# Altium PCB Analog RPM PCB.PcbDoc
Units mm, origin at the board's own origin, x right, y up, seen from the top; angles counter-clockwise.
Board outline 36 x 29 mm, 4 copper layers (Top Layer, Mid Layer 1, Mid Layer 2, Bottom Layer), stack 1.57 mm thick; 35 components, 20 nets, 108 pads, 22 vias.
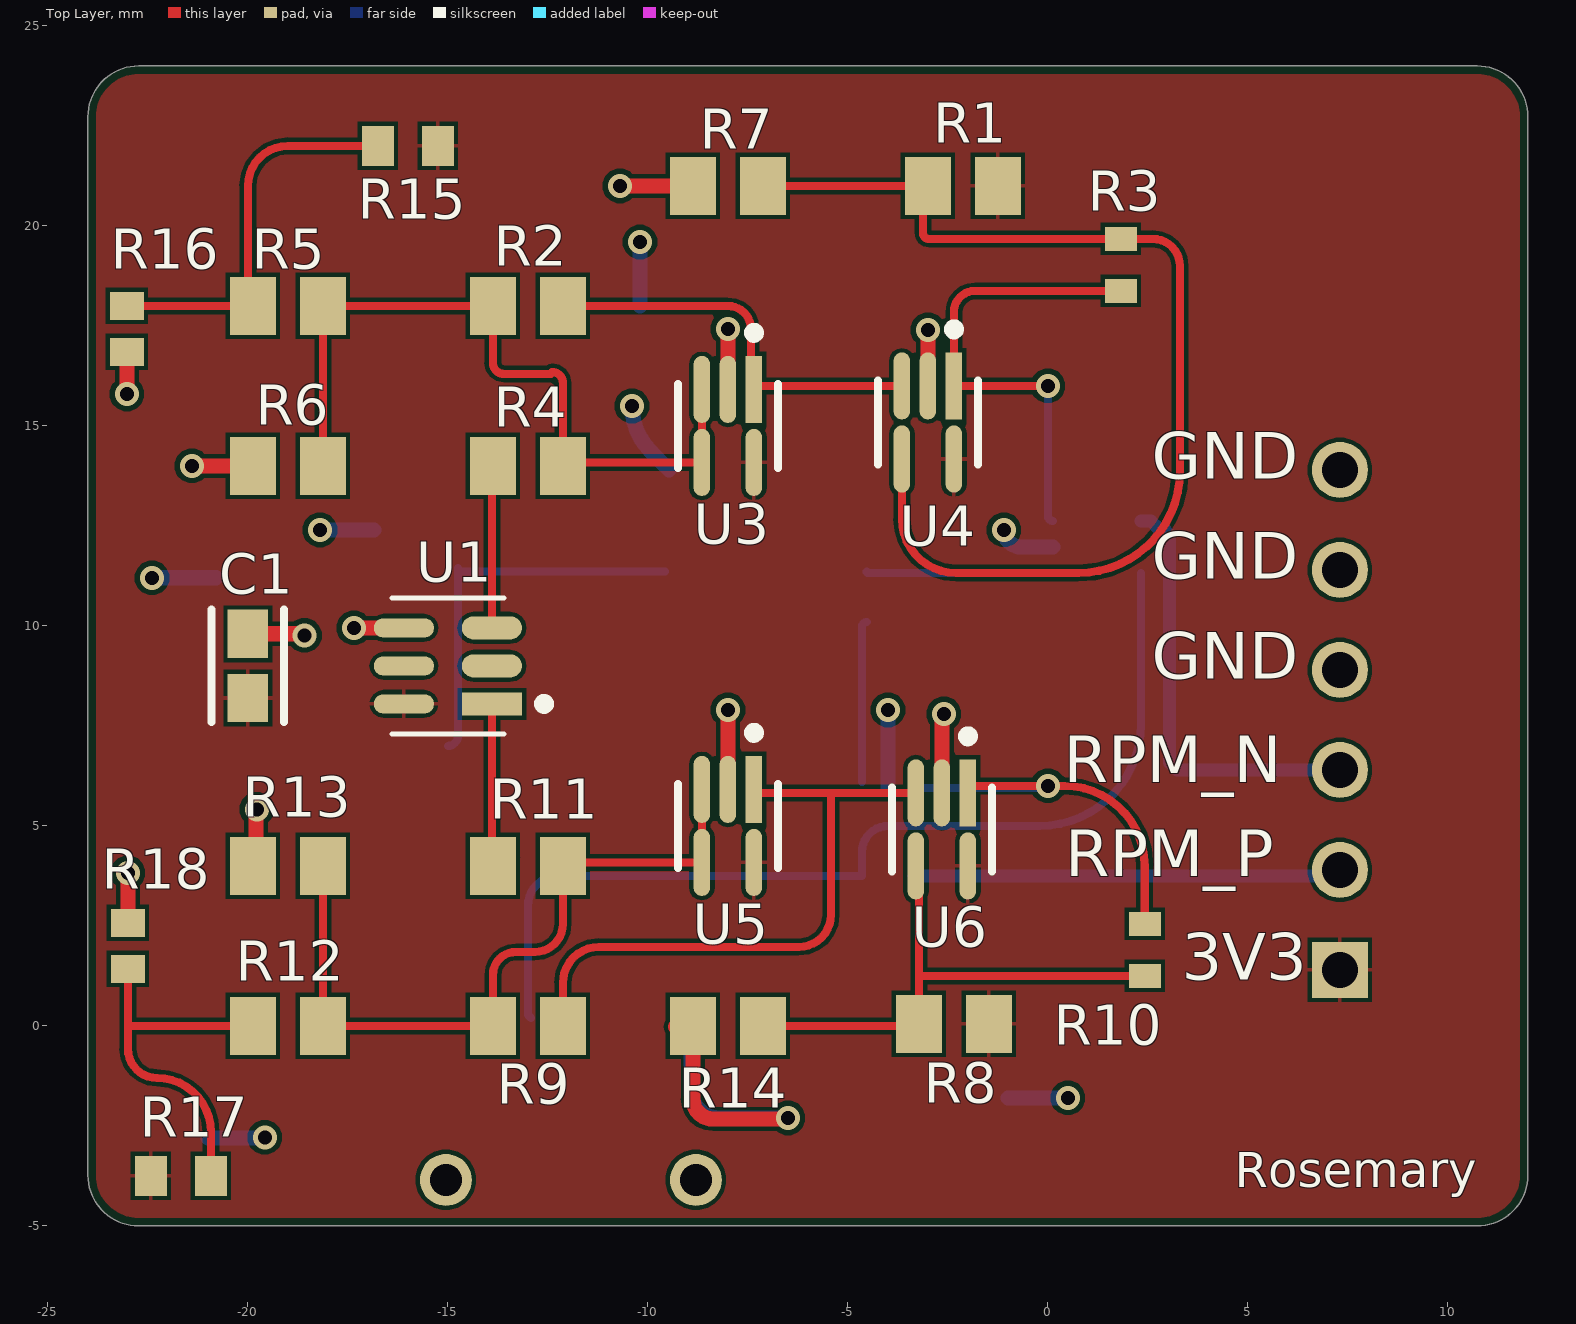
[diagram p0: Top Layer view]
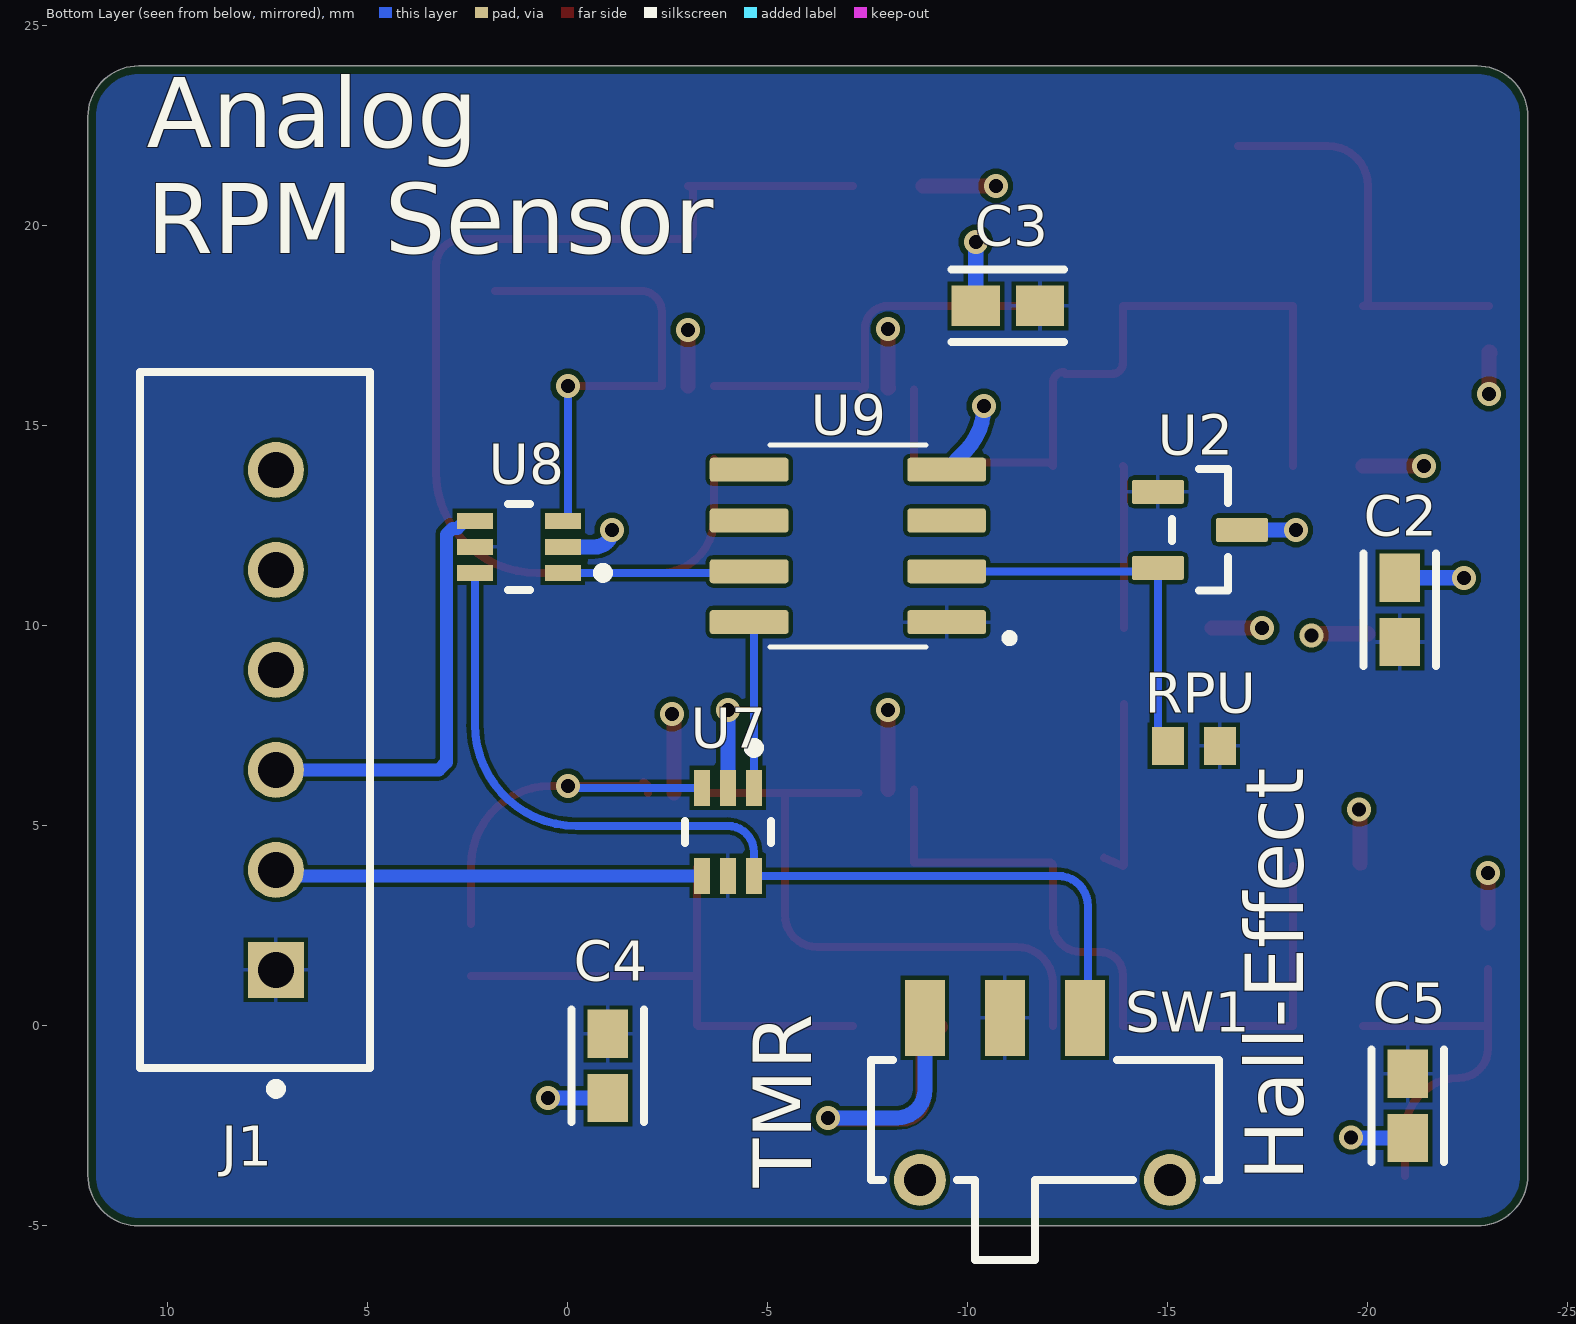
[diagram p1: Bottom Layer view, seen from below]
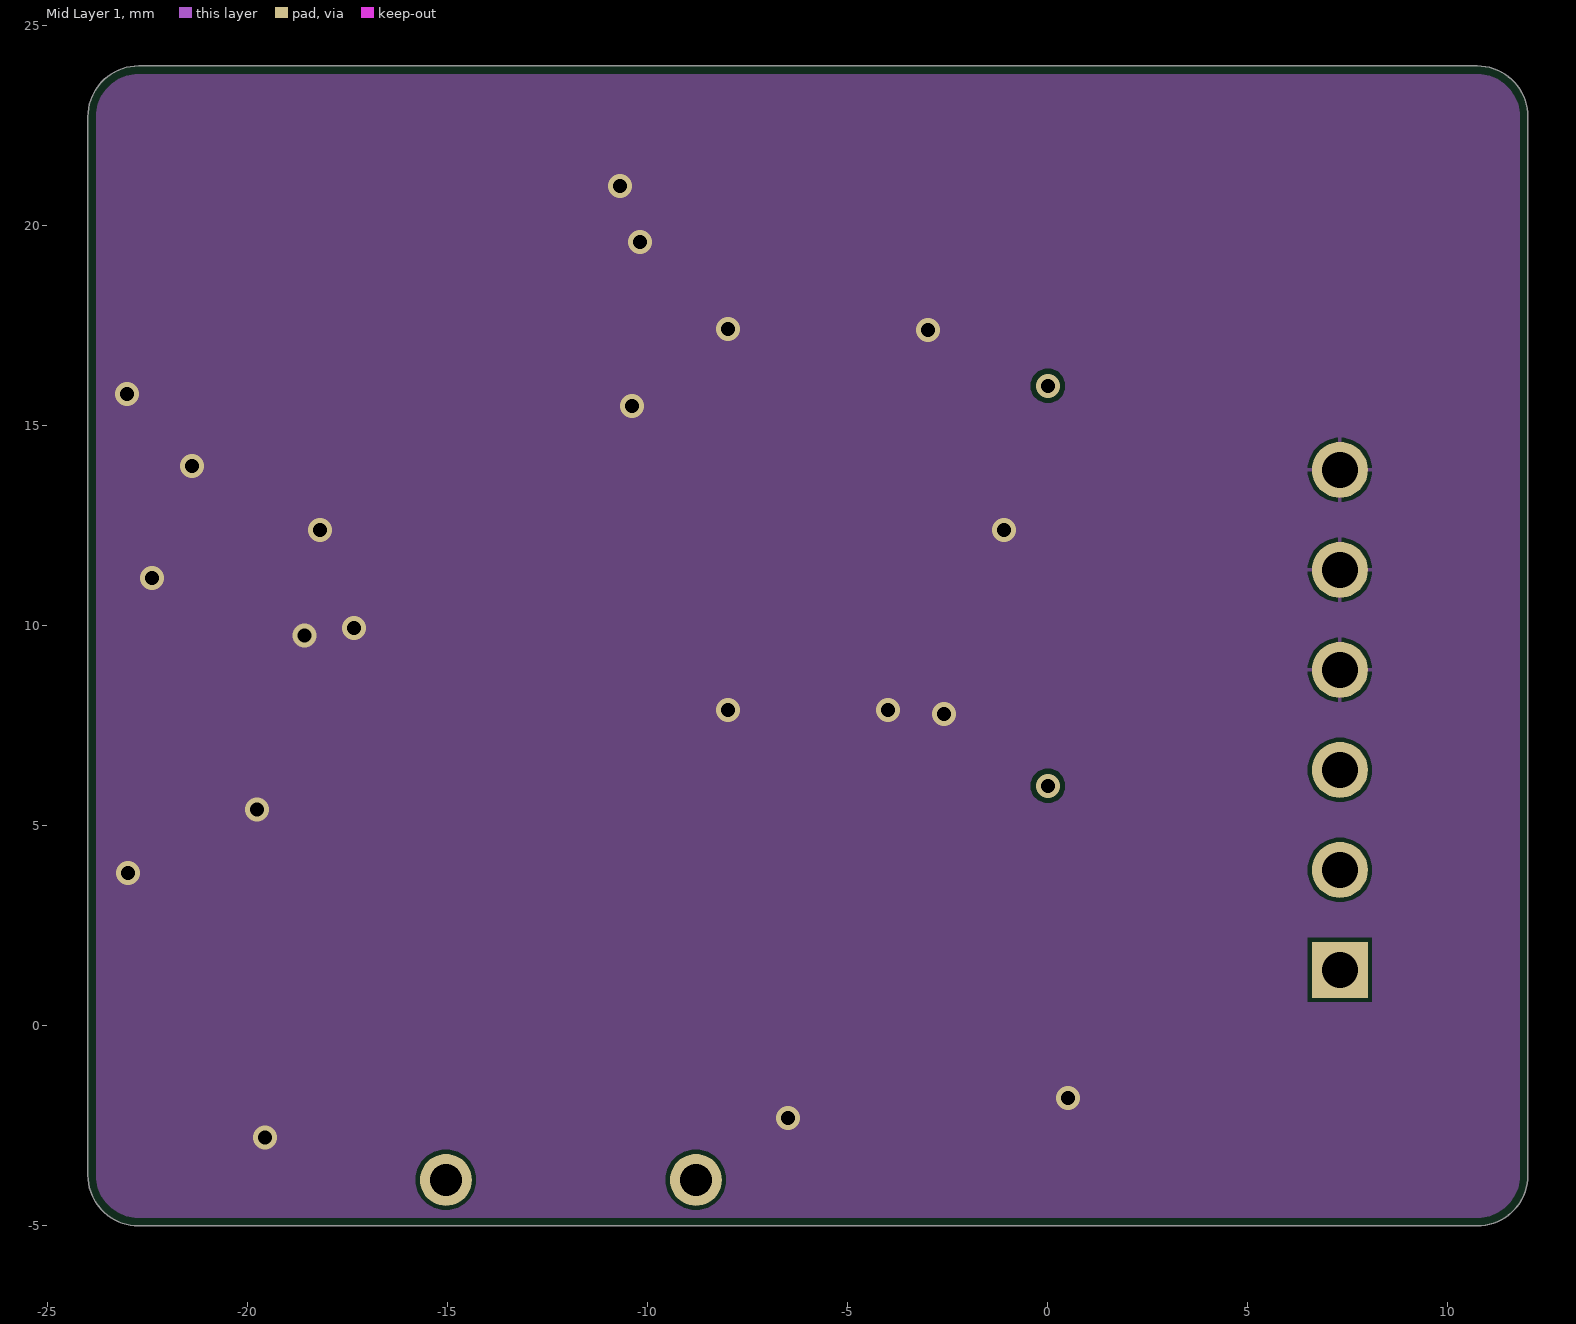
[diagram p2: Mid Layer 1]
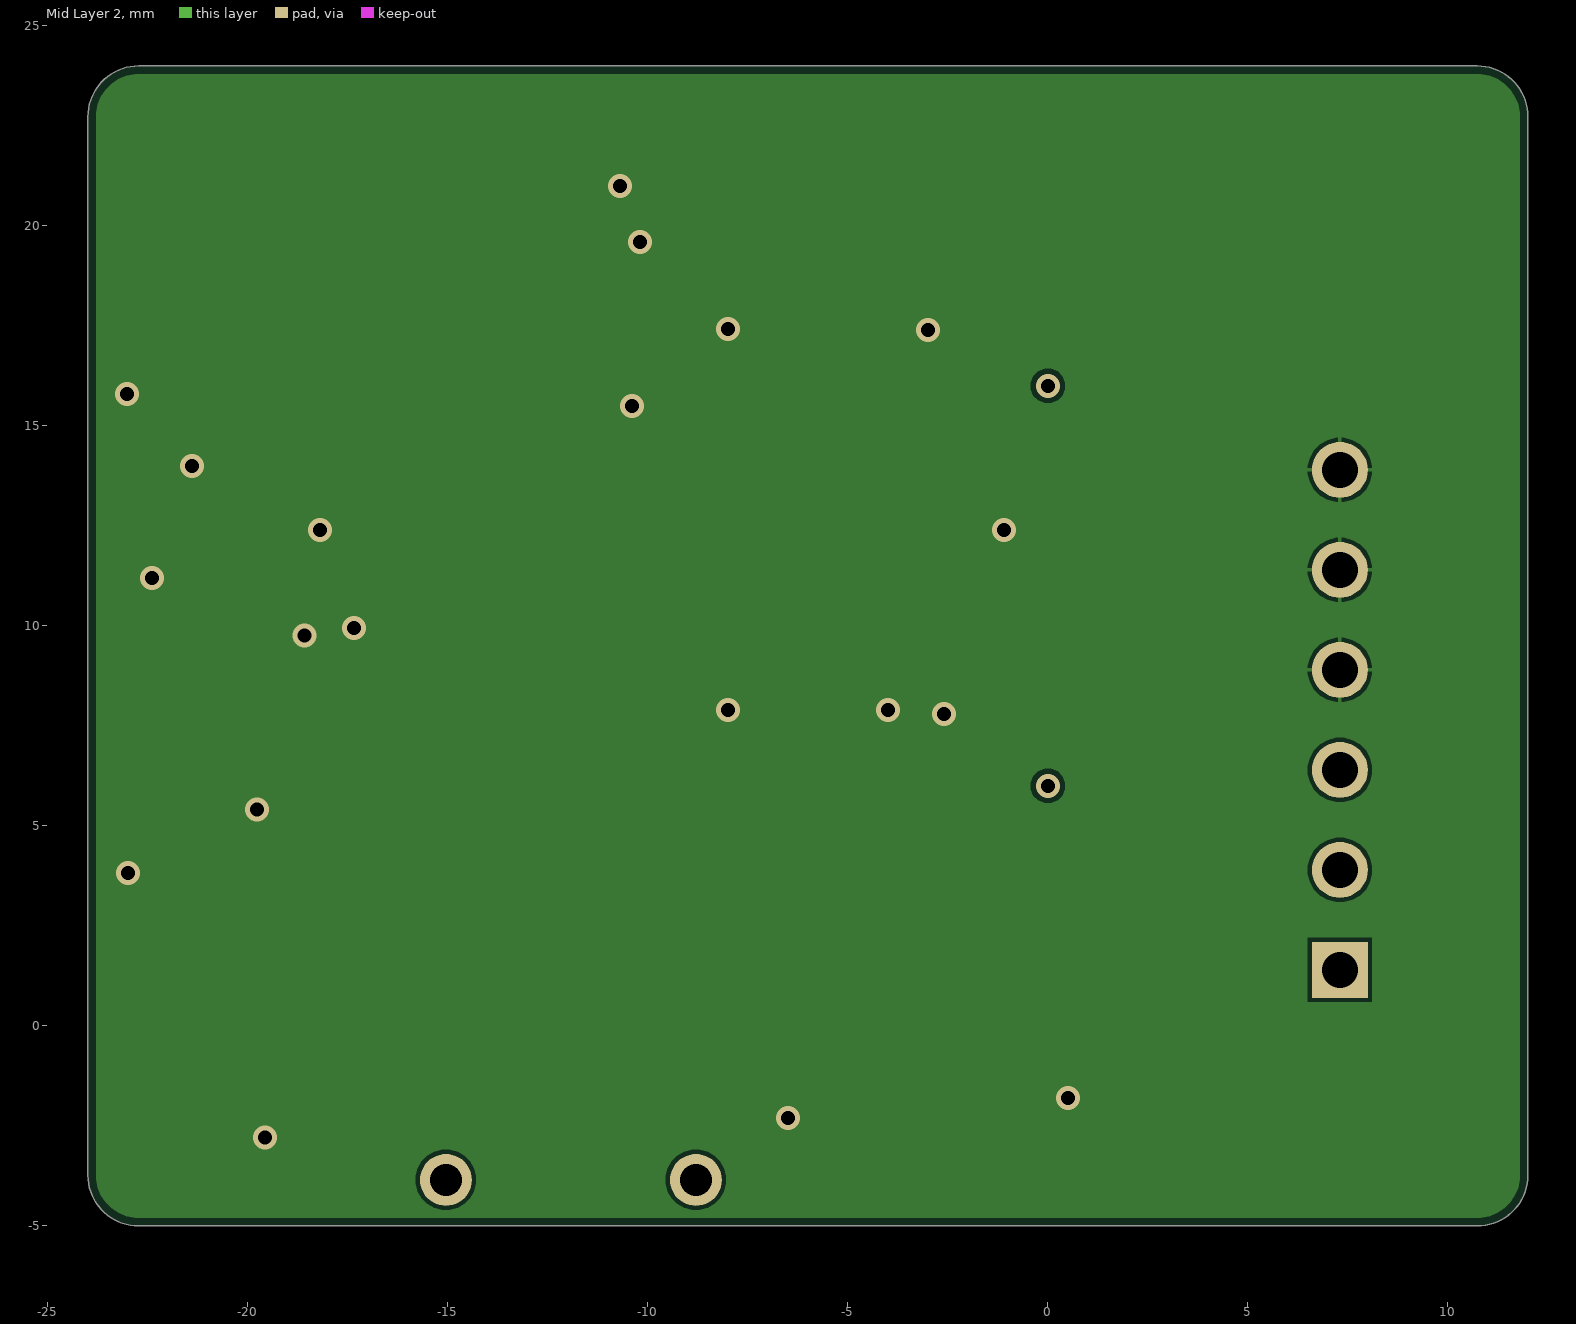
[diagram p3: Mid Layer 2]
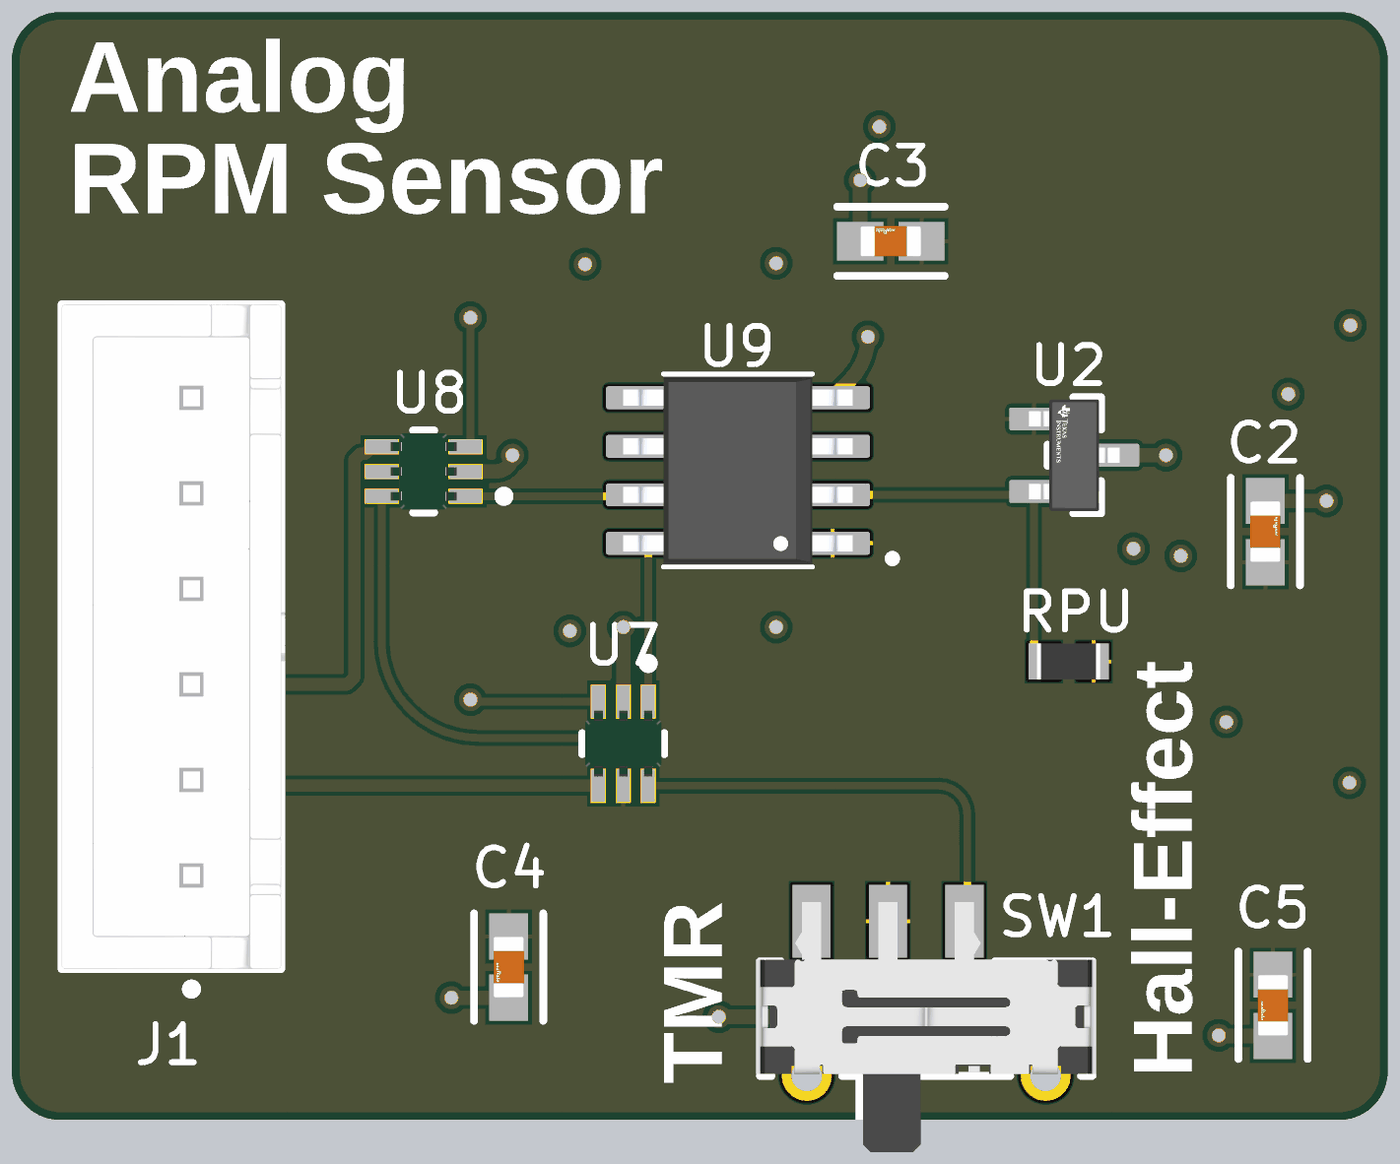
[diagram p4: 3D render of the assembled board from below, using the file's embedded part models]

## Layer stack, top to bottom
Top Solder: solder mask 0.0254, Solder Resist, Dk 3.8
Top Layer: signal copper 0.035
Dielectric 1: prepreg 0.2, 7628, Dk 4.6
Mid Layer 1: signal copper 0.0175
Core: core 1.065, FR-4, Dk 4.5
Mid Layer 2: signal copper 0.0175
Dielectric 2: prepreg 0.2, 7628, Dk 4.6
Bottom Layer: signal copper 0.035
Bottom Solder: solder mask 0.0254, Solder Resist, Dk 3.8

## Board outline
-22.73,-5 cw(c-22.73,-3.73) -24,-3.73 -24,22.73 cw(c-22.73,22.73) -22.73,24 10.73,24 cw(c10.73,22.73) 12,22.73 12,-3.73 cw(c10.73,-3.73) 10.73,-5

## Design rules (kind name [scope] priority, off if disabled: settings)
BoardOutlineClearance [All] p1: gap=0.2 ignorepadtopadclearanceinfootprint=FALSE
Clearance [All] p1: gap=0.102 ignorepadtopadclearanceinfootprint=FALSE except(0.127: Arc-Via Track-Via SMDPad-Via THPad-Via Via-Via Via-Fill Via-Poly Via-Region Via-Text; 0.25: Arc-Hole Track-Hole SMDPad-Hole THPad-Hole Via-Hole Fill-Hole Poly-Hole Region-Hole Text-Hole)
ComponentClearance [All] p1: gap=0.102 collisioncheckmode=3 verticalgap=0.102 showdistances=TRUE
DiffPairsRouting RPM_DIFF [InDifferentialPair('RPM')] p1: maxlimit=0.127 minlimit=0.127 mostfreqgap=0.127 toplayer_minwidth=0.325 toplayer_maxwidth=0.325 toplayer_prefwidth=0.325 bottomlayer_minwidth=0.325 bottomlayer_maxwidth=0.325 bottomlayer_prefwidth=0.325 impedanceprofiledriven=TRUE impedanceprofileid={B6967C9A-FB02-41AA-8B41-4971396319F1} impedanceprofilevalue=70.000000 maxuncoupledlength=12.7
DiffPairsRouting [All] p2: maxlimit=0.102 minlimit=0.102 mostfreqgap=0.102 toplayer_minwidth=0.102 toplayer_maxwidth=1816.048 toplayer_prefwidth=0.102 midlayer1_minwidth=0.102 midlayer1_maxwidth=1816.048 midlayer1_prefwidth=0.102 midlayer2_minwidth=0.102 midlayer2_maxwidth=1816.048 midlayer2_prefwidth=0.102 bottomlayer_minwidth=0.102 bottomlayer_maxwidth=1816.048 bottomlayer_prefwidth=0.102 maxuncoupledlength=12.7
Height [All] p1: minheight=0 maxheight=1816.048 prefheight=12.7
HoleSize [All] p1: absolutevalues=TRUE maxlimit=6.3 minlimit=0.2 maxpercent=80.000 minpercent=20.000
HoleToHoleClearance [All] p1: gap=0.25 allowstackedmicrovias=FALSE
MinimumAnnularRing [All] p1: minimumring=0.076
MinimumSolderMaskSliver [All] p1: minsoldermaskwidth=0
PlaneClearance [All] p1: clearance=0.102
PlaneConnect PlaneConnectPowerPads [InPadClass('PowerPads')] p1: planeconnectstyle=Direct reliefexpansion=0.508 reliefentries=4 reliefconductorwidth=0.254 reliefairgap=0.254
PlaneConnect [All] p2: pad.planeconnectstyle=Relief pad.reliefexpansion=0.3 pad.reliefentries=4 pad.reliefconductorwidth=0.102 pad.reliefairgap=0.102 via.planeconnectstyle=Direct via.reliefexpansion=0.3 via.reliefentries=4 via.reliefconductorwidth=0.127 via.reliefairgap=0.127
PolygonConnect PolygonConnectPowerPads [All vs (InPadClass('PowerPads'))] p1: connectstyle=Direct reliefconductorwidth=0.254 reliefentries=4 polygonreliefangle="90 Angle" airgapwidth=0.254
PolygonConnect [All] p2: thpad.connectstyle=Relief thpad.reliefconductorwidth=0.102 thpad.reliefentries=4 thpad.polygonreliefangle="90 Angle" thpad.airgapwidth=0.102 smdpad.connectstyle=Relief smdpad.reliefconductorwidth=0.102 smdpad.reliefentries=4 smdpad.polygonreliefangle="90 Angle" smdpad.airgapwidth=0.102 via.connectstyle=Direct via.reliefconductorwidth=0.127 via.reliefentries=4 via.polygonreliefangle="90 Angle" via.airgapwidth=0.127
RoutingVias [All] p1: holewidth=0.35 width=0.5 viastyle="Through Hole" minholewidth=0.2 minwidth=0.45 maxholewidth=6.3 maxwidth=6.55
SilkToSilkClearance [All] p1: silktosilkclearance=0
SilkToSolderMaskClearance [IsPad] p1: minsilkscreentomaskgap=0.102 clearancetoexposedcopper=TRUE
SolderMaskExpansion [All] p1: expansion=0.075 istentingtop=FALSE
SupplyNets "Schematic Supply Nets_1" [InNet('GND')] p1: voltage=0.000
SupplyNets "Schematic Supply Nets" [InNet('3V3')] p2: voltage=0.000
Width Width_2 [InNet('GND')] p1: maxlimit=1816.048 minlimit=0.102 preferedwidth=0.381 minimp=50.000000 maximp=50.000000 favimp=50.000000
Width Width_4 [InNet('1V6')] p2: maxlimit=1816.048 minlimit=0.102 preferedwidth=0.381 minimp=50.000000 maximp=50.000000 favimp=50.000000
Width [InNet('3V3')] p3: maxlimit=1816.048 minlimit=0.102 preferedwidth=0.381 minimp=50.000000 maximp=50.000000 favimp=50.000000
Width Width_1 [All] p4: maxlimit=0.254 minlimit=0.102 preferedwidth=0.203 minimp=50.000000 maximp=50.000000 favimp=50.000000
20 further rules are at their usual default settings.

## Classes and differential pairs
differential pair RPM: +RPM_P -RPM_N

## Components (designator, comment, footprint, x,y, rotation, side; value= is the part's Value field where it differs from the comment)
C1 "0.01uF" FP-GRM188-0_1-e0_2_0_55-IPC_A -20,9 r90 top
C2 "0.01uF" FP-GRM188-0_1-e0_2_0_55-IPC_A -20.8,10.4 r90 bottom
C3 "0.01uF" FP-GRM188-0_1-e0_2_0_55-IPC_A -11,18 r0 bottom
C4 "0.01uF" FP-GRM188-0_1-e0_2_0_55-IPC_A -1,-1 r270 bottom
C5 "0.01uF" FP-GRM188-0_1-e0_2_0_55-IPC_A -21,-2 r270 bottom
J1 "B6B-XH-A(LF)(SN)" FP-B6B-XH-A_LF_SN-MFG 7.825,7.65 r90 bottom
R1 "Resistor 100K +/-5% 0805 125 mW" RESC2013X70X40NL20T20 -2.125,21 r180 top value=100k
R2 "Resistor 1K +/-5% 0805 500 mW" RESC2013X70X40NL20T20 -13,18 r0 top value=1k
R3 "RC0603FR-07348KL" RESC1608X55X25LL10T15 1.825,19.025 r270 top
R4 "Resistor 1K +/-5% 0805 500 mW" RESC2013X70X40NL20T20 -13,14 r0 top value=1k
R5 "Resistor 1K +/-5% 0805 500 mW" RESC2013X70X40NL20T20 -19,18 r0 top value=1k
R6 "Resistor 1K +/-5% 0805 500 mW" RESC2013X70X40NL20T20 -19,14 r180 top value=1k
R7 "Resistor 100K +/-5% 0805 125 mW" RESC2013X70X40NL20T20 -8,21 r180 top value=100k
R8 "Resistor 100K +/-5% 0805 125 mW" RESC2013X70X40NL20T20 -2.35,0.05 r180 top value=100k
R9 "Resistor 1K +/-5% 0805 500 mW" RESC2013X70X40NL20T20 -13,0 r0 top value=1k
R10 "RC0603FR-07348KL" RESC1608X55X25LL10T15 2.425,1.9 r90 top
R11 "Resistor 1K +/-5% 0805 500 mW" RESC2013X70X40NL20T20 -13,4 r0 top value=1k
R12 "Resistor 1K +/-5% 0805 500 mW" RESC2013X70X40NL20T20 -19,0 r0 top value=1k
R13 "Resistor 1K +/-5% 0805 500 mW" RESC2013X70X40NL20T20 -19,4 r180 top value=1k
R14 "Resistor 100K +/-5% 0805 125 mW" RESC2013X70X40NL20T20 -8,0 r180 top value=100k
R15 "RC0603FR-071K5L" RESC1608X55X25ML10T15 -16,22 r0 top
R16 "CRCW06031K60FKEA" RESC1609X50X30LL10T20 -23.025,17.425 r90 top
R17 "RC0603FR-071K5L" RESC1608X55X25ML10T15 -21.675,-3.75 r180 top
R18 "CRCW06031K60FKEA" RESC1609X50X30LL10T20 -23,2 r270 top
RPU "10k" RESC1609X50X30NL8T20 -15.65,7 r0 bottom
SW1 "450405020524" 450405020524 -11.925,-2.35 r180 bottom
U1 "CT100LW-IS6" SOT95P280X120-6_CT100LW-IS6_N -15,9 r180 top
U2 "DRV5013" FP-DBZ0003A-MFG -15.8,12.4 r180 bottom
U3 "TLV7031DCKR" FP-DCK0005A-IPC_A -8,15 r270 top
U4 "TLV7031DCKR" FP-DCK0005A-IPC_A -3,15.086 r270 top
U5 "TLV7031DCKR" FP-DCK0005A-IPC_A -8,5 r270 top
U6 "TLV7031DCKR" FP-DCK0005A-IPC_A -2.65,4.914 r270 top
U7 "SN74LVC1G3157DCKR" FP-DCK0006A-MFG -4,4.85 r270 bottom
U8 "SN74LVC1G3157DCKR" FP-DCK0006A-MFG 1.225,11.975 r0 bottom
U9 "SN65LVDS9638D" SOIC127P599X175-8N -7,12 r0 bottom

## Footprints (in the part's own frame and the unit in brackets; to place one, negate y for a bottom-side part, rotate by r counter-clockwise, add the part's x,y. Pads: shape width x height; smd on the part's side, far side on the other; paste and mask are expansions set on the pad)
450405020524 [mm] "SMT Mini Slide Switch, Same side connection"
  rect 1x1.9 smd: COM(1,2.55) L1(-3,2.55) L2(-1,2.55)
  round 1.3 hole 0.8: MH1(-3.125,-1.5) MH2(3.125,-1.5)
  silkscreen extent -4.35,-3.5 4.35,1.5, body extent -4.45,-3.5 4.45,3.05, height 1.98
FP-B6B-XH-A_LF_SN-MFG [mm]
  rect 1.4x1.4 hole 0.9 paste-2539.97 mask+0: 1(-6.25,-0.525)
  round 1.4 hole 0.9 paste-2539.97 mask+0: 2(-3.75,-0.525) 3(-1.25,-0.525) 4(1.25,-0.525) 5(3.75,-0.525) 6(6.25,-0.525)
  silkscreen extent -9.35,-2.88 8.7,2.87, body extent -8.7,-2.98 8.7,2.88, height 7
FP-DBZ0003A-MFG [mm]
  rrect17% 1.3x0.6 smd paste+0 mask+0: 1(-1.05,0.95) 2(-1.05,-0.95) 3(1.05,0)
  silkscreen extent -0.7,-1.52 0.7,1.52, body extent -1.18,-1.46 1.18,1.46, height 1.12
FP-DCK0005A-IPC_A [mm]
  rect 1.677x0.416 smd paste+0 mask+0: 1(-0.913,0.65)
  rrect100% 1.677x0.416 smd paste+0 mask+0: 2(-0.913,0) 3(-0.913,-0.65) 4(0.914,-0.65) 5(0.914,0.65)
  silkscreen extent -2.45,-1.25 1.05,1.25
FP-DCK0006A-MFG [mm]
  rect 0.9x0.4 smd paste-1000 mask+0: 1(-1.1,0.65) 2(-1.1,0) 3(-1.1,-0.65) 4(1.1,-0.65) 5(1.1,0) 6(1.1,0.65)
  silkscreen extent -2.22,-1.07 0.27,1.08, body extent -1.1,-1 1.1,1, height 1.1
FP-GRM188-0_1-e0_2_0_55-IPC_A [mm]
  rect 1.208x1.012 smd paste+0 mask+0: 1(-0.802,0) 2(0.802,0)
  silkscreen extent -1.41,-0.91 1.41,0.91, body extent -1.91,-1.01 1.91,1.01, height 0.25
RESC1608X55X25LL10T15 [mm] "Chip Resistor, 2-Leads, Body 1.60x0.80mm, IPC High Density"
  rect 0.6x0.8 smd: 1(-0.65,0) 2(0.65,0)
  body extent -0.85,-0.45 0.85,0.45, height 0.55
RESC1608X55X25ML10T15 [mm] "Chip Resistor, 2-Leads, Body 1.60x0.80mm, IPC Low Density"
  rect 0.8x1 smd: 1(-0.75,0) 2(0.75,0)
  body extent -0.85,-0.45 0.85,0.45, height 0.55
RESC1609X50X30LL10T20 [mm] "Chip Resistor, 2-Leads, Body 1.55x0.85mm, IPC High Density"
  rect 0.7x0.85 smd: 1(-0.575,0) 2(0.575,0)
  body extent -0.82,-0.48 0.82,0.48, height 0.5
RESC1609X50X30NL8T20 [mm] "Chip Resistor, 2-Leads, Body 1.65x0.95mm, IPC Medium Density"
  rect 0.8x0.95 smd: 1(-0.65,0) 2(0.65,0)
  body extent -0.82,-0.48 0.82,0.48, height 0.5
RESC2013X70X40NL20T20 [mm] "Chip Resistor, 2-Leads, Body 2.00x1.25mm, IPC Medium Density"
  rect 1.15x1.45 smd: 1(-0.875,0) 2(0.875,0)
  body extent -1.1,-0.72 1.1,0.72, height 0.7
SOIC127P599X175-8N [mm]
  rrect25% 1.97x0.6 smd: 1(-2.47,1.905) 2(-2.47,0.635) 3(-2.47,-0.635) 4(-2.47,-1.905) 5(2.47,-1.905) 6(2.47,-0.635) 7(2.47,0.635) 8(2.47,1.905)
  silkscreen extent -4.14,-2.52 1.95,2.53, body extent -3,-2.45 3,2.45, height 1.75
SOT95P280X120-6_CT100LW-IS6_N [mm]
  rect 1.505x0.582 smd: 1(-1.1,0.95)
  rrect100% 1.505x0.582 smd: 2(-1.1,0) 3(-1.1,-0.95)
  rrect100% 1.505x0.482 smd: 4(1.1,-0.95) 5(1.1,0) 6(1.1,0.95)
  silkscreen extent -2.53,-1.7 1.4,1.7, body extent -2.1,-1.7 2.1,1.7, height 0.25

## Part data
C1 C2 C3 C4 C5: library part CMP-2006-02792-2, "Chip Multilayer Ceramic Capacitors for General Purpose, 0603, 10uF, X5R, 15%, 20%, 6.3V", Capacitance=10uF, Case Code (Imperial)=0603, Case Code (Metric)=1608, Dielectric=X5R, Max Operating Temperature=85°C, Min Operating Temperature=-55°C, Package Quantity=4000, Tolerance=20%, Voltage=6.3V, Case/Package=0603, Depth=0.8mm, Height=0.8mm, Lead Free="Lead Free", Length=1.6mm, Material=Ceramic, Mount="Surface Mount", Packaging="Tape and Reel", Radiation Hardening=No, REACH SVHC="No SVHC", Termination=SMD/SMT, Thickness=0.035inch, Voltage Rating=6.3V, Voltage Rating (DC)=6.3V, Width=0.031inch
J1: library part CMP-17439-000076-1, "CONN HEADER VERT 6POS 2.5MM"
R1 R7 R8 R14: library part CMP-009-00217-1, "Fixed Resistor, Metal Glaze/thick Film, 0.125W, 100000ohm, 150V, 5% +/-Tol, 200ppm/Cel, Surface Mount, 0805", Case/Package=0805, Max Operating Temperature=155°C, Min Operating Temperature=-55°C, Package Height=0.6mm, Package Length=2mm, Package Shape=Rectangular, Package Width=1.25mm, Power=125mW, Rated Temperature=70°C, Resistor Type="FIXED RESISTOR", Temperature Coefficient=200ppm/°C, Tolerance=5%, Working Voltage=150V, Construction=Rectangular, JESD-609 Code=e3, Mounting Technology="Surface Mount", Packaging="Tape and Reel", Pins=2, Reach SVHC Compliant=Yes, Reference Standard=AEC-Q200, RoHS Compliant=Yes, Technology="METAL GLAZE/THICK FILM", Terminal Finish=Nickel, Termination=Wraparound
R2 R4 R5 R6 R9 R11 R12 R13: library part CMP-009-00218-1, "Fixed Resistor, Metal Glaze/thick Film, 0.5W, 1000ohm, 400V, 5% +/-Tol, 200ppm/Cel, Surface Mount, 0805", Case/Package=0805, Max Operating Temperature=155°C, Min Operating Temperature=-55°C, Package Height=0.6mm, Package Length=2mm, Package Shape=Rectangular, Package Width=1.25mm, Power=500mW, Rated Temperature=70°C, Resistor Type="FIXED RESISTOR", Temperature Coefficient=200ppm/°C, Tolerance=5%, Working Voltage=400V, Construction=Rectangular, JESD-609 Code=e3, Mounting Technology="Surface Mount", Packaging="Tape and Reel", Pins=2, Reach SVHC Compliant=Yes, Reference Standard=AEC-Q200, RoHS Compliant=Yes, Technology="METAL GLAZE/THICK FILM", Terminal Finish=Tin, Termination=Wraparound
R3 R10: library part CMP-2000-04017-1, Manufacturer=Yageo, Part Number=RC0603FR-07348KL
R15 R17: library part CMP-2100-03665-1, "Chip Resistor, 1.5 KOhm, +/- 1%, 0.1 W, -55 to 155 degC, 0603 (1608 Metric), RoHS, Tape and Reel", Case Code (Imperial)=0603, Case Code (Metric)=1608, Manufacturer=Yageo, Max Operating Temperature=155degC, Max Power Dissipation=100mW, Min Operating Temperature=-55degC, Package Description="2-Pin Surface Mount Device, Body 1.6 x 0.8 mm", Package Quantity=1, Resistance=1.5KOhm, Temperature Coefficient=100ppm/degreesC, Tolerance=1%, Voltage Rating=50V, Case/Package=0603, Composition=ThickFilm, Datasheet URL=http://www.yageo.com/NewPortal/yageodocoutput?fileName=/pdf/R-Chip/PYu-RC_Group_51_RoHS_L_5.pdf, Datasheet Version="Rev. 5, 10/2016", Depth=0.8mm, Height=0.022inch, Lead Free=LeadFree, Length=0.063inch, Manufacturer URL=http://www.yageo.com/, Military Standard=Not, Number of Pins=2, Number of Terminations=2, Package Reference=0603, Packaging=TapeandReel, Power Rating=100mW, REACH SVHC=NoSVHC, RoHSCompliant=true, Termination=SMD/SMT, Voltage Rating (DC)=50V, Width=0.031inch
R16 R18: library part CMP-2000-03000-1, Manufacturer="Vishay Dale", Part Number=CRCW06031K60FKEA
RPU: library part CMP-1666-00005-4, "Chip Resistor, 10 KOhm, +/- 1%, 100 mW, -55 to 155 degC, 0603 (1608 Metric), RoHS, Tape and Reel", Manufacturer="Vishay Semiconductor", Max Operating Temperature="155 degC", Min Operating Temperature="-55 degC", Package Quantity=5000, Voltage Rating="75 V", ComponentLink1Description="Manufacturer URL", ComponentLink1URL=http://www.vishay.com/, ComponentLink2Description=Datasheet, ComponentLink2URL=https://datasheet.ciiva.com/11809/0900766b80d98afc-11809037.pdf, DatasheetVersion=06/2012, Height="0.45 mm", Length="1.55 mm", Mounting Technology="Surface Mount", PackageDescription="2-Pin Surface Mount Device, Body 1.575 x 0.85 mm", PackageReference=0603, Packaging="Tape and Reel", REACH SVHC=Unknown, RoHSCompliant=true
SW1: library part CMP-03913-107782335-1, "450405020524 WS-SLSU Mini Slide Switch", Insulation Resistance=100MΩ, Max Operating Temperature=85°C, Min Operating Temperature=-40°C, Contact Plating=Silver, NexarPartId=107782335, Packaging="Tape and Reel", RoHS=Compliant
U1: library part CMP-08330-103130247-1, "Differential TMR high sensitivity Magnetic 1D Linear sensor", ComponentLink1Description="Manufacturer's Website", ComponentLink1URL=http://www.allegromicro.com/, ComponentLink2Description="Datasheet URL", ComponentLink2URL=https://www.allegromicro.com/-/media/files/datasheets/ct100-datasheet.pdf, HelpURL=https://www.allegromicro.com/-/media/files/datasheets/ct100-datasheet.pdf, RoHS=Compliant
U2: library part CMP-04937-000026-1, "SENSOR HALL ANALOG SOT23-3", Case/Package=SOT-23, Max Operating Temperature=125°C, Max Supply Voltage=38V, Min Operating Temperature=-40°C, Min Supply Voltage=2.5V, Output Current=2.3mA, Contact Plating=Gold, Lead Free="Lead Free", Mount="Surface Mount", Number of Pins=3, Packaging="Tape and Reel", Radiation Hardening=No, RoHS Compliant=Yes
U3 U4 U5 U6: library part CMP-04896-000085-1, "VOLTAGE COMPARATOR", Input Bias Current=2pA, Input Offset Voltage (Vos)=8mV, Max Operating Temperature=125°C, Min Operating Temperature=-40°C, Power Supply Rejection Ratio (PSRR)=77dB, Quiescent Current=900nA, Common Mode Rejection Ratio=77dB, Hysteresis=7mV, Max Input Current=2pA, Mount="Surface Mount", Number of Channels=1, Number of Elements=1, Packaging="Tape and Reel", Propagation Delay=3us, RoHS Compliant=Yes, Type="General Purpose"
U7 U8: library part CMP-011-00018-1, "SPDT, 1 Func, 1 Channel, CMOS, PDSO6", Max Operating Temperature=85°C, Min Operating Temperature=-40°C, RoHS Compliant=Yes
U9: library part CMP-092-000000-1, "1500-Mbps LVDS dial high speed differential driver", Package="SOIC-8 Texas Instruments", Check_prices=https://www.snapeda.com/parts/SN65LVDS9638D/Texas+Instruments/view-part/?ref=eda, Component Type=Standard, Design Item ID=SN65LVDS9638D, MF="Texas Instruments", MP=SN65LVDS9638D, Pin Count=8, SnapEDA_Link=https://www.snapeda.com/parts/SN65LVDS9638D/Texas+Instruments/view-part/?ref=snap, Source=SN65LVDS9638D.SchLib

## Via types
v1: diameter 0.6, hole 0.35, Top Layer to Bottom Layer, tented both sides, 22 vias

## Nets (pads, with @x,y where several pads share a name; then routed paths per layer and width w, separated by ;. In a path a pad name is that pad's centre, name@x,y a point inside that pad or via, vN(x,y) a via of type N, cw(c..) or ccw(c..) an arc to the next point about the centre after c; other vN are vias at no path point)
3V3: C1.1 C2.1 C3.1 C4.1 C5.1 J1.1 R1.1 R8.1 R15.2 R17.2 RPU.1 SW1.L2 U1.6 U2.1 U3.5 U4.5 U5.5 U6.5 U7.5 U8.5 U9.1
CT100_X1: R4.1 U1.3 | length 4.1
  Top Layer w0.203: U1.3 -13.9,13.975 R4.1
CT100_X2: R11.1 U1.1 | length 4.6
  Top Layer w0.203: U1.1 -13.9,4.025 R11.1 R11.1@-13.402,4.203
DRV5013_OUT: RPU.2 U2.2 U9.2 | length 9.8
  Bottom Layer w0.203: RPU.2 ccw(c-15,7.25) -14.75,7.25 U2.2 ccw(c-14.665,11.45) -14.665,11.365 U9.2@-9.57,11.365
GND: C1.2 C2.2 C3.2 C4.2 C5.2 J1.4 J1.5 J1.6 R6.2 R7.2 R13.2 R14.2 R16.1 R18.1 SW1.L1 U1.4 U2.3 U3.2 U4.2 U5.2 U6.2 U7.2 U8.2 U9.4 | length 38.9
  Top Layer w0.203: C1.2 ccw(c-20.302,10.104) C1.2@-19.875,10.104 ; R13.2 ccw(c-19.875,4.075) R13.2@-19.8,4.075 ; v1@-18.6,9.8 v1@-18.6,9.802
  Top Layer w0.381: R16.1@-23.05,16.825 cw(c-23.025,16.825) R16.1 v1(-23.025,15.8) ; R18.1 v1(-23,3.825) ; v1(-21.4,14) R6.2 ; C1.2 v1@-18.6,9.802 ; R13.2@-19.8,4.075 v1@-19.8,5.4 ; v1(-17.35,9.95) U1.4 ; v1(-10.7,21) R7.2 ; R14.2@-9.306,-0.023 R14.2@-9.264,-0.064 ; R14.2 -8.875,-1.825 ccw(c-8.375,-1.825) -8.375,-2.325 -6.525,-2.325 ccw(c-6.525,-2.3) v1(-6.5,-2.3) ; U3.2@-8.007,15.945 -8,15.952 v1(-8,17.425) ; U5.2 v1(-8,7.9) ; U4.2 v1(-3,17.4) ; U6.2 -2.65,7.718 -2.6,7.768 v1(-2.6,7.8)
  Bottom Layer w0.381: v1(-22.398,11.202) C2.2 ; C5.2 -19.6,-2.802 v1@-19.6,-2.8 ; v1(-18.2,12.4) U2.3 ; v1(-10.4,15.5) ccw(c-8.794,15.5) -9.93,14.365 U9.4 ; C3.2 v1(-10.198,19.598) ; SW1.L1 -8.925,-1.6 ccw(c-8.225,-1.6) -8.225,-2.3 v1(-6.5,-2.3) ; U7.2 v1(-4,7.9) ; v1(-1.1,12.4) ccw(c-0.675,12.4) -0.675,11.975 U8.2 ; C4.2 v1@0.5,-1.802
  other v1: -19.578,-2.786 0.5,-1.8 -19.778,5.416 -18.586,9.763
NetR1_2: R1.2 R3.1 R7.1 U4.4 | length 28.1
  Top Layer w0.203: R7.1 R1.2 ccw(c-3,20.875) -3.125,20.875 -3.125,19.825 ccw(c-2.975,19.825) -2.975,19.675 R3.1 2.625,19.675 cw(c2.625,19) 3.3,19 3.3,13.865 cw(c0.76,13.865) 0.76,11.325 -2.3,11.325 cw(c-2.3,12.675) -3.65,12.675 U4.4
NetR5_1: R5.1 R15.1 R16.2 | length 10
  Top Layer w0.203: R16.2 R5.1 cw(c-19.875,18.125) -20,18.125 -20,21 cw(c-19,21) -19,22 R15.1
NetR8_2: R8.2 R10.1 R14.1 U6.4 | length 13.6
  Top Layer w0.203: R14.1 -3.275,0 ccw(c-3.275,0.05) R8.2 -3.225,1.25 ; U6.4 cw(c-3.3,3.925) -3.225,3.925 -3.225,1.775 -3.225,1.75 -3.225,1.25 ; R10.1 -3.225,1.25
NetR12_1: R12.1 R17.1 R18.2 | length 9.5
  Top Layer w0.203: R18.2 -23,0.025 ; R17.1 -20.925,-2.65 ccw(c-22.275,-2.65) -22.275,-1.3 cw(c-22.275,-0.575) -23,-0.575 -23,0.025 ; R12.1 -22.975,0 cw(c-22.975,0.025) -23,0.025
RPM_N: J1.3 U8.4 | length 10.9
  Bottom Layer w0.325: U8.4 2.575,12.625 2.761,12.439 2.884,12.439 3.039,12.284 3.039,6.59 3.229,6.4 J1.3
RPM_P: J1.2 U7.4 | length 10.8
  Bottom Layer w0.325: U7.4 7.3,3.75 J1.2
SELECT: SW1.COM U7.6 U8.6 | length 24.8
  Bottom Layer w0.203: SW1.COM -13,0.275 -13,3 cw(c-12.25,3) -12.25,3.75 U7.6 -4.65,4.35 cw(c-4,4.35) -4,5 -0.215,5 ccw(c-0.215,7.54) 2.325,7.54 U8.6
SN65L_1Y: U7.1 U9.8 | length 4.1
  Bottom Layer w0.203: U7.1@-4.65,6.1 -4.65,9.975 cw(c-4.53,9.975) U9.8
SN65L_1Z: U8.1 U9.7 | length 4.7
  Bottom Layer w0.203: U9.7 ccw(c-4.49,11.365) -4.49,11.325 U8.1
TLV7031_X1: R3.2 U4.1 U8.3 | length 12.1
  Top Layer w0.203: v1(0,16) U4.1 -2.35,17.85 cw(c-1.825,17.85) -1.825,18.375 R3.2
  Bottom Layer w0.203: v1(0,16) 0,12.75 ccw(c0.125,12.75) U8.3
TLV7031_X2: R10.2 U6.1 U7.3 | length 10.7
  Top Layer w0.203: U6.1@-1.894,6.1 -2,5.994 U6.1 cw(c-1.827,5.827) -1.827,6 v1@-0.15,6 ; v1(0,6) 0.421,6 cw(c0.421,4.002) 2.419,4.002 2.419,2.556 R10.2
  Bottom Layer w0.203: U7.3 -0.05,5.95 ccw(c-0.05,6) v1(0,6)
X1_IN: R2.1 R4.2 R5.2 R6.1 U3.3 U3.4 | length 19.2
  Top Layer w0.203: R5.2 R2.1 -13.875,16.575 ccw(c-13.6,16.575) -13.6,16.3 -12.45,16.3 ccw(c-12.45,16.35) -12.4,16.35 cw(c-12.4,16.075) -12.125,16.075 -12.125,14.086 R4.2 -12.039,14.086 U3.4 U3.3 ; R6.1 R5.2
X1_OP: R2.2 U3.1 U4.3 | length 10.2
  Top Layer w0.203: R2.2 -8,18 cw(c-8,17.425) -7.425,17.425 -7.425,15.989 ccw(c-7.35,15.989) U3.1 ; U3.1@-7.263,16 U4.3
X2_IN: R9.1 R11.2 R12.2 R13.1 U5.3 U5.4 | length 18.8
  Top Layer w0.203: R13.1 R12.2 R9.1 -13.875,1.275 cw(c-13.3,1.275) -13.3,1.85 -12.825,1.85 ccw(c-12.825,2.55) -12.125,2.55 R11.2 cw(c-12.039,4) -12.039,4.086 U5.4 U5.3
X2_OP: R9.2 U5.1 U6.3 | length 15.8
  Top Layer w0.203: R9.2 -12.125,1.075 cw(c-11.225,1.075) -11.225,1.975 -6.225,1.975 ccw(c-6.225,2.775) -5.425,2.775 -5.425,5.777 ccw(c-5.475,5.777) -5.475,5.827 ; U5.1@-7.264,5.827 -5.475,5.827 ; U6.3 -5.475,5.827
pads on no net: SW1.MH1 SW1.MH2 U1.2 U1.5 U9.3 U9.5 U9.6

## Polygon pours and split planes (outlines as drawn)
GND on Mid Layer 1 "GND_L02_P009" (solid, remove dead copper, pour order 9): -22.73,-5 cw(c-22.73,-3.73) -24,-3.73 -24,22.73 cw(c-22.73,22.73) -22.73,24 10.73,24 cw(c10.73,22.73) 12,22.73 12,-3.73 cw(c10.73,-3.73) 10.73,-5
GND on Mid Layer 2 "GND_L03_P013" (solid, remove dead copper, pour order 13): -22.73,-5 cw(c-22.73,-3.73) -24,-3.73 -24,22.73 cw(c-22.73,22.73) -22.73,24 10.73,24 cw(c10.73,22.73) 12,22.73 12,-3.73 cw(c10.73,-3.73) 10.73,-5
3V3 on Bottom Layer "3V3_L04_P012" (solid, remove dead copper, pour order 12): -22.73,-5 cw(c-22.73,-3.73) -24,-3.73 -24,22.73 cw(c-22.73,22.73) -22.73,24 10.73,24 cw(c10.73,22.73) 12,22.73 12,-3.73 cw(c10.73,-3.73) 10.73,-5
3V3 on Top Layer "3V3_L01_P008" (solid, remove dead copper, pour order 8): -22.73,-5 cw(c-22.73,-3.73) -24,-3.73 -24,22.73 cw(c-22.73,22.73) -22.73,24 10.73,24 cw(c10.73,22.73) 12,22.73 12,-3.73 cw(c10.73,-3.73) 10.73,-5

## Silkscreen, mask and mechanical layers (free items; w line width, h text height)
Top Overlay:
  text "GND" at 2.591,13.297 h2
  text "GND" at 2.591,10.797 h2
  text "GND" at 2.591,8.297 h2
  text "RPM_N" at 0.398,5.706 h2
  text "RPM_P" at 0.428,3.356 h2
  text "3V3" at 3.35,0.772 h2
  text "Rosemary" at 4.675,-4.318 h1.5
Bottom Overlay:
  text "Analog" at 10.528,21.391 h3
  text "RPM Sensor" at 10.525,18.736 h3
  text "Hall-Effect" at -18.875,-3.875 h2.5 r270
  text "TMR" at -6.575,-4.05 h2.5 r270
Mechanical 1:
  lines w0.254: -23.925,-3.58 ccw(c-22.655,-3.58) -22.655,-4.85 10.65,-4.85 ccw(c10.65,-3.6) 11.9,-3.6 11.9,22.655 ccw(c10.63,22.655) 10.63,23.925 -6.95,23.925 -22.655,23.925 ccw(c-22.655,22.655) -23.925,22.655 -23.925,-3.58